# EAGLE board TVMC (EAGLE 4.13)
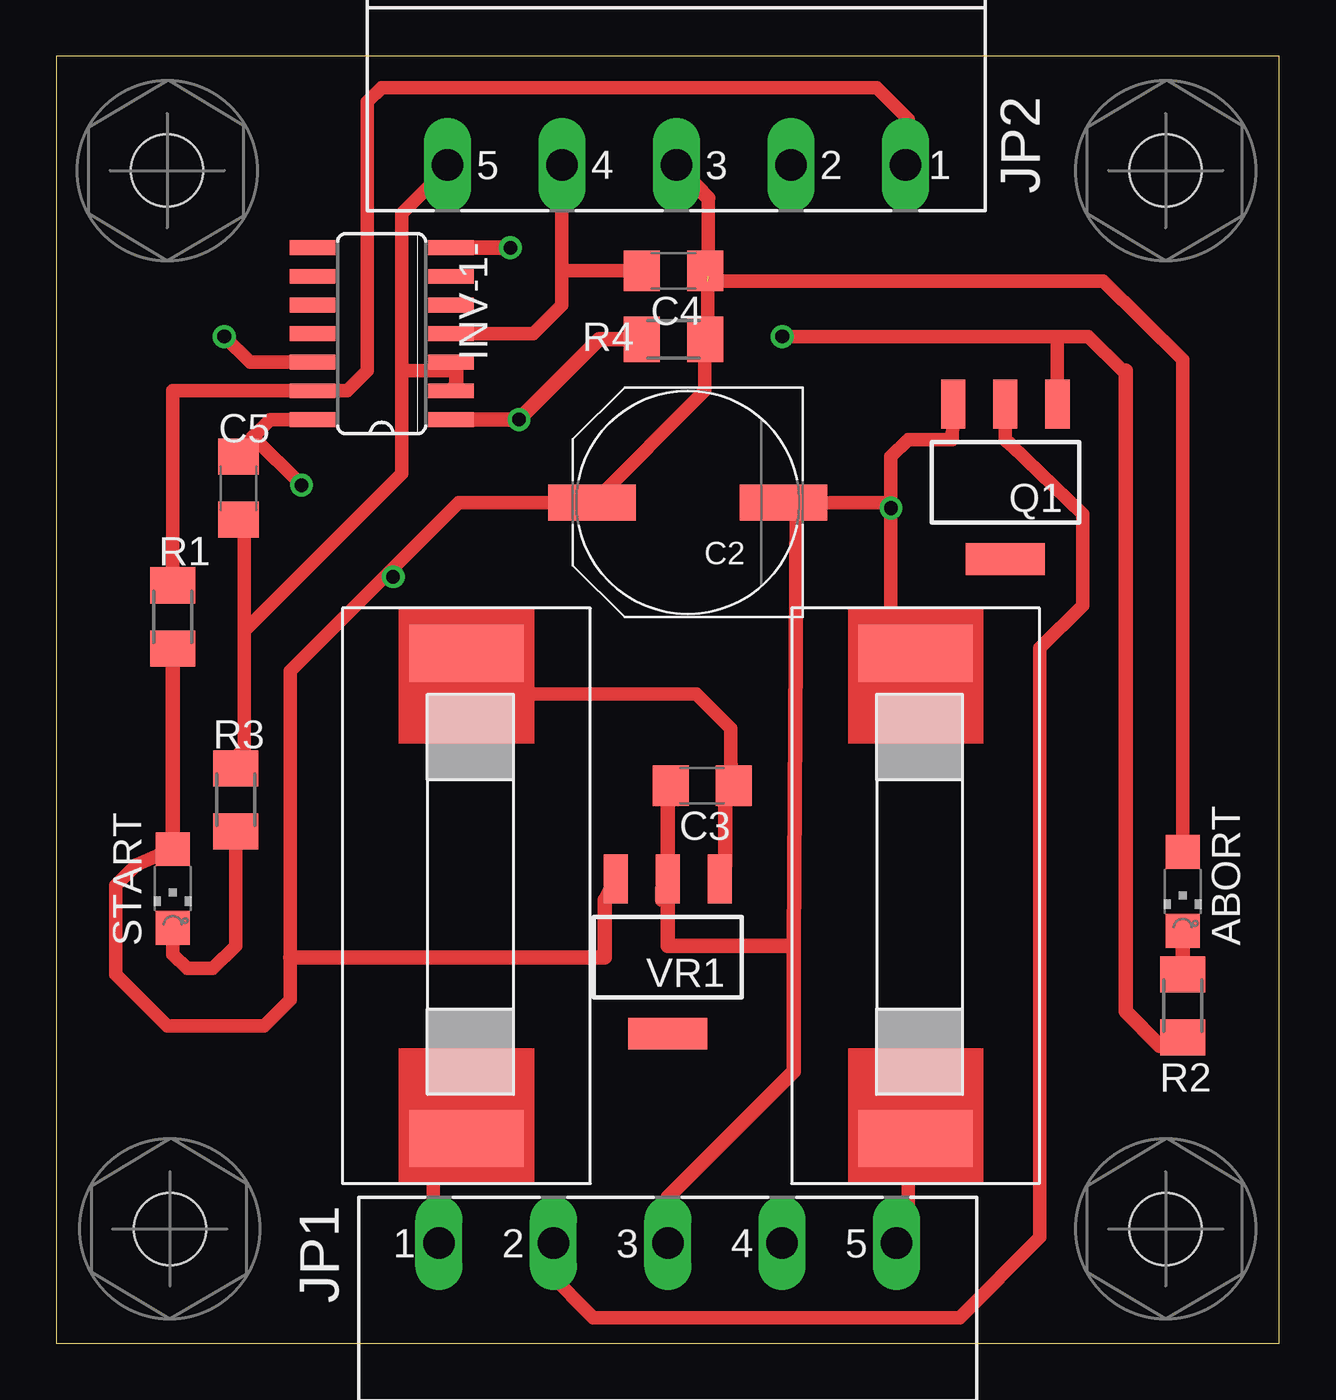
[diagram p0: board, top side]
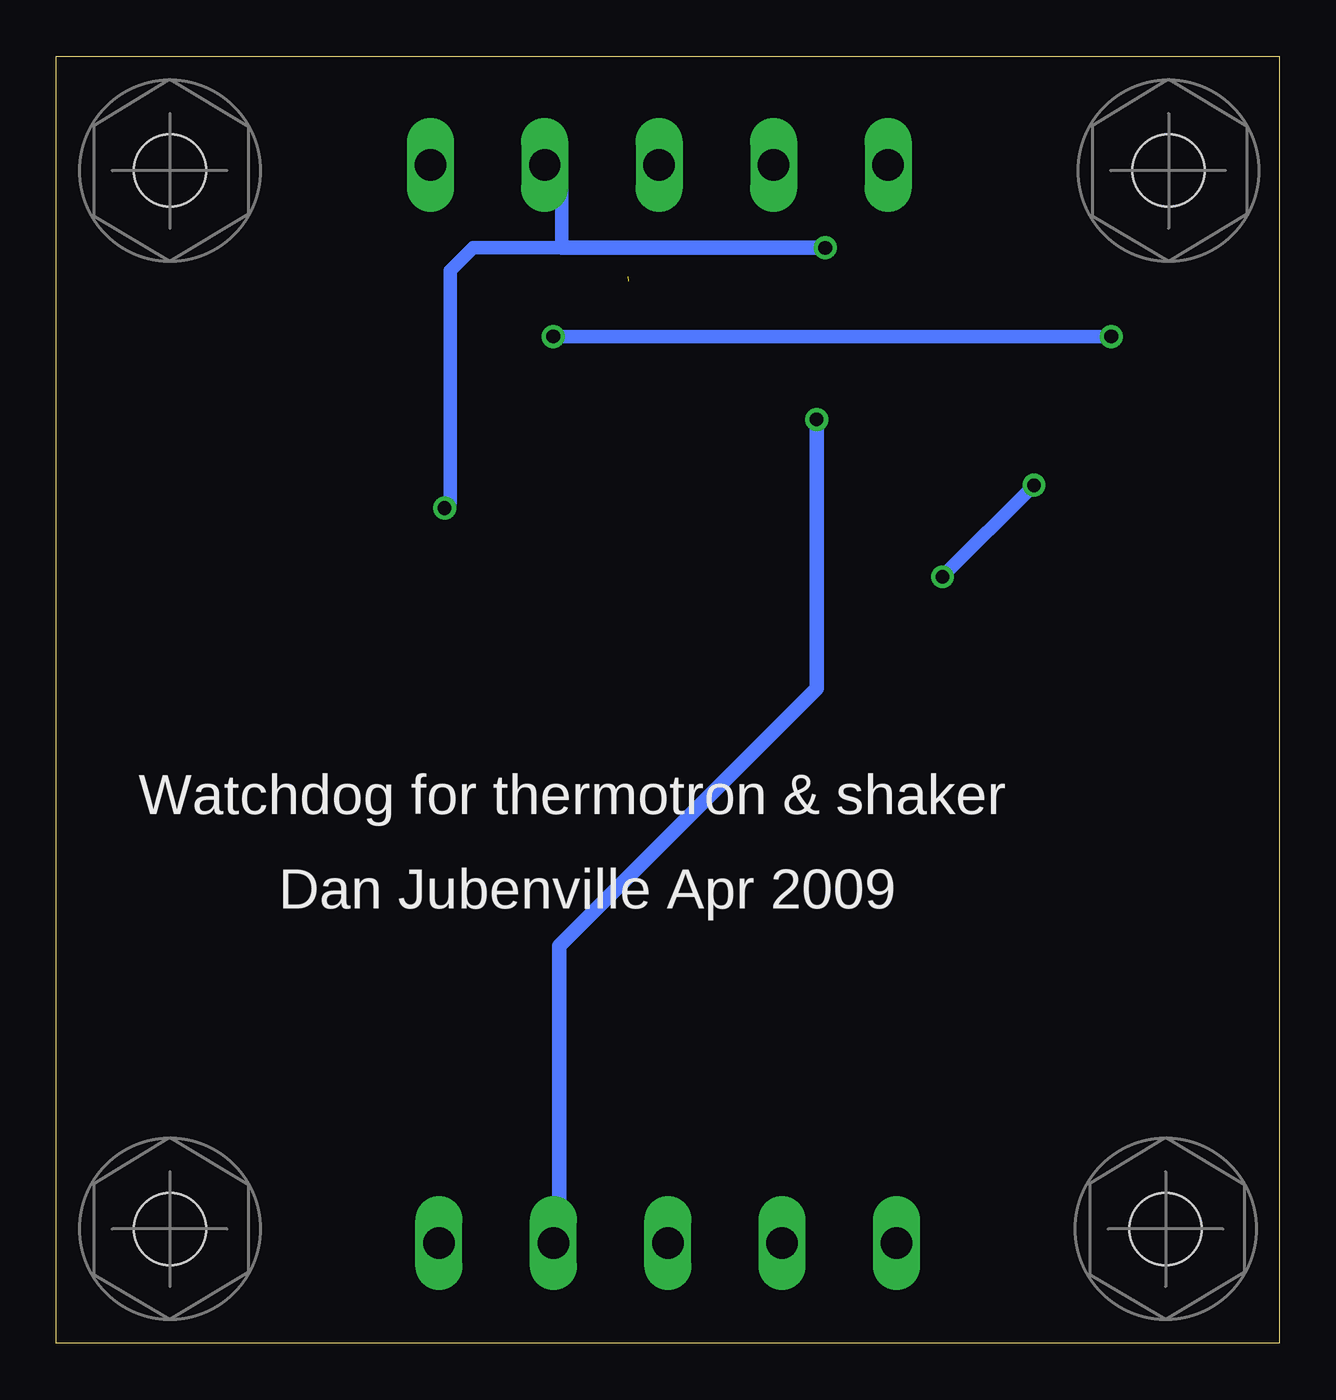
[diagram p1: board, bottom side, seen from below]

Size 54.28 x 57.14 mm. Coordinates in mm from the lower left corner, seen from the top.
Outline: 0,0 54.28,0 54.28,57.14 0,57.14 0,0
Copper layers (1*16): Top 0.035mm / dielectric 1.5mm / Bottom 0.035mm
Design rules "default": minimum track width 20mil, minimum drill 20mil, track to track 10mil, track to pad 10mil, pad to pad 10mil, via to via 10mil, smd to smd 0mil, copper to edge 20mil, drill to drill 8mil, minimum pad ring 10mil, minimum via ring 8mil, stop-mask expansion 4mil, vias tented up to drill 0mil, thermal gap 10mil
vRestrict: area 5,17.8 to 15.2,22.9

## Footprints (pad centres in the part's own frame; a part is rotated, then mirrored left to right if it is on the bottom)
CHIPLED_1206 = smd 1.5 x 1.5: A 0,-1.75; C 0,1.75
PANASONIC_G = smd 3.9 x 1.6: + 4.25,0; - -4.25,0
C1206 = smd 1.6 x 1.8: 1 -1.4,0; 2 1.4,0
SO14 = smd 0.66 x 2.032: 1 -3.81,-3.073; 2 -2.54,-3.073; 3 -1.27,-3.073; 4 0,-3.073; 5 1.27,-3.073; 6 2.54,-3.073; 7 3.81,-3.073; 8 3.81,3.073; 9 2.54,3.073; 10 1.27,3.073; 11 0,3.073; 12 -1.27,3.073; 13 -2.54,3.073; 14 -3.81,3.073
MSTBA5 = drill 1.397 long: 1 -10.16,5.08; 2 -5.08,5.08; 3 0,5.08; 4 5.08,5.08; 5 10.16,5.08
SOT223R_INFINEON = smd 1.067 x 2.184: 1 -2.311,-3.479; 2 0,-3.48; 3 2.312,-3.48 | smd 3.5 x 1.4: 4 0,3.404
M1206 = smd 1.6 x 2: 1 -1.4,0; 2 1.4,0
FUSE = smd 2.54 x 5.08: P$1 2,5.54; P$2 23.54,5.54
SCREW = hole 3.2: 0,0

## Placement (x,y rotation side)
ABORT  [CHIPLED_1206]  50,20.06 180 top
C2  15uF  [PANASONIC_G]  28.03,37.33 180 top
C3  .1uF  [C1206]  28.66,24.76 180 top
C4  >1uF  [C1206]  27.39,47.62 180 top
C5  >1uF  [C1206]  8.09,37.97 270 top
INV-1-  7416D  [SO14]  14.44,44.83 90 top
JP1  MSTBA5  [MSTBA5]  27.14,-0.64 0 top
JP2  MSTBA5  [MSTBA5]  27.52,57.4 180 top
Q1  [SOT223R_INFINEON]  42.13,38.22 180 top
R1  >20k  [M1206]  5.17,32.25 270 top
R2  330  [M1206]  50,14.98 90 top
R3  330  [M1206]  7.96,24.12 270 top
R4  >20k  [M1206]  27.39,44.57 0 top
START  [CHIPLED_1206]  5.17,20.19 180 top
U$1  1/2 amp  [FUSE]  12.66,32.63 270 top
U$2  [SCREW]  49.24,5.08 0 top
U$3  FUSE(SM)  [FUSE]  32.6,32.63 270 top
U$7  [SCREW]  5.04,5.08 0 top
U$8  [SCREW]  4.92,52.06 0 top
U$9  [SCREW]  49.24,52.06 0 top
VR1  [SOT223R_INFINEON]  27.14,17.14 180 top

## Library data of the parts
ABORT START = led
C2-C5 Q1 R1-R4 U$1-U$3 U$7-U$9 VR1 = 1 Dan's Common Parts
INV-1- = 74xx-eu
JP1 JP2 = con-phoenix-508

## Nets
+5V: ABORT.A C2.+ C4.1 C5.1 INV-1-.14 JP2.3 R1.2 R4.2 START.A VR1.3
GND: C2.- C3.2 INV-1-.7 JP1.3 JP2.2 Q1.3 U$3.P$1 VR1.2
N$1: INV-1-.13 JP2.1 R1.1
N$3: JP1.2 Q1.2
N$4: ABORT.C R2.2
N$9: C3.1 U$1.P$1 VR1.1
N$10: INV-1-.1 JP1.4 R4.1
N$12: R3.2 START.C
N$13: INV-1-.12 Q1.1 R2.1
N$14: JP1.5 U$3.P$2
N$15: JP1.1 U$1.P$2
N$16: C4.2 INV-1-.4 JP2.4
N$18: C5.2 INV-1-.2 INV-1-.3 JP2.5 R3.1

## Tracks (layer width: path | path; a pad name or v marks a point on that pad's centre or on a via)
+5V  (via drill 0.61)  (1 unrouted)
  Top 0.61: 15.07,34.54 17.87,37.33 C2.+ 23.84,37.33 28.79,42.29 28.79,44.83 R4.2 28.92,44.7 28.92,47.37 | 14.88,34.35 10.38,29.84 10.38,17.14 10.38,15.23 9.23,14.09 4.92,14.09 2.63,16.38 2.63,20.32 3.55,21.24 START.A | 14.88,34.35 15.07,34.54 | ABORT.A 50,43.68 46.47,47.16 28.89,47.16 | 28.92,47.37 C4.1 | 28.94,50.85 28.94,47.39 28.92,47.37 | 14.88,34.35 14.82,34.16 | INV-1-.14 9.49,41.02 8.09,39.62 C5.1 | C5.1 | C5.1 8.72,40.26 v10.88,38.09 | C5.1 | v14.95,34.03 14.95,34.41 15.07,34.54
  Top 0.635: START.A R1.2 | 28.94,50.85 JP2.3 | 10.38,17.14 24.35,17.14 24.35,19.68 VR1.3
  Bottom 0.61: v14.95,34.03 v10.88,38.09
GND  (via drill 0.61)
  Top 0.61: 32.86,37.21 34.38,37.33 37.05,37.33 | Q1.3 39.76,40.13 37.81,40.13 37.05,39.36 37.05,37.33 | 37.05,37.33 v37.05,37.08 37.05,30.33 U$3.P$1
  Top 0.635: v20.16,48.64 INV-1-.7 | 27.39,24.51 27.39,24.76 27.65,25.01 | 27.65,25.01 27.14,24.76 27.14,17.65 | 32.73,17.65 32.86,37.21 32.6,37.21 C2.- | 27.65,25.01 C3.2 27.14,24 VR1.2 26.89,20.19 26.89,19.68 27.14,19.93 27.14,17.65 | JP1.3 27.14,6.47 32.73,12.06 32.73,17.65 | 32.73,17.65 27.14,17.65
  Bottom 0.61: v37.05,37.08 36.79,37.33 36.79,47.62 35.78,48.64 31.84,48.64 31.84,51.56 JP2.2
  Bottom 0.635: 31.84,48.64 v20.16,48.64
N$1
  Top 0.61: R1.1 5.17,42.29 INV-1-.13 12.92,42.29 13.8,43.17 13.8,55.11 14.44,55.75 36.41,55.75 37.81,54.35 JP2.1
N$3
  Top 0.61: JP1.2 21.81,3.17 23.84,1.14 40.09,1.14 43.65,4.69 43.65,30.86 45.56,32.76 45.56,36.82 42.38,39.87 42.13,40.13 Q1.2
N$4
  Top 0.635: R2.2 ABORT.C
N$9
  Top 0.61: U$1.P$1 17.23,28.82 28.41,28.82 29.93,27.3 29.93,25.78 C3.1
  Top 0.635: VR1.1 29.43,20.7 29.68,21.2 29.68,24 C3.1
N$10  (via drill 0.61)
  Top 0.635: R4.1 24.09,44.57 v20.54,41.02 INV-1-.1
  Bottom 0.635: v20.54,41.02 20.54,29.08 31.97,17.65 31.97,4.95 JP1.4
N$12
  Top 0.61: START.C 5.17,17.27 5.8,16.63 6.95,16.63 7.96,17.65 R3.2
N$13  (via drill 0.61)
  Top 0.61: 11.65,43.56 INV-1-.12 8.6,43.56 v7.46,44.7 | 47.46,43.17 47.33,43.17 45.81,44.7 44.29,44.7 | v32.22,44.7 44.29,44.7 | Q1.1 44.44,44.67 44.29,44.7
  Top 0.635: 47.46,43.17 47.46,14.73 48.98,13.2 R2.1
  Bottom 0.61: v7.46,44.7 v32.22,44.7
N$14
  Top 0.61: U$3.P$2 38.06,10.54 37.81,10.03 37.81,4.69 37.55,4.44 JP1.5
N$15
  Top 0.61: U$1.P$2 15.96,11.55 16.73,11.04 16.73,4.19 JP1.1
N$16
  Top 0.61: INV-1-.4 21.17,44.83 | 21.17,44.83 22.44,46.1 22.44,47.62 | 22.44,47.62 C4.2 | 21.17,44.83 | 22.44,47.62 JP2.4
N$18
  Top 0.61: R3.1 7.96,26.03 8.34,26.41 8.34,31.49 8.34,31.62 | 8.34,31.62 15.33,38.6 15.33,43.17 | 17.11,43.17 17.61,43.17 17.74,43.3 17.51,43.53 INV-1-.3 17.49,43.56 17.11,43.17 | C5.2 8.09,36.44 8.34,36.19 8.34,31.62 | 15.33,43.17 17.11,43.17 | 15.33,43.17 15.33,50.16 17.74,52.57 17.49,52.57 17.36,52.45 JP2.5
  Top 0.635: INV-1-.2 17.74,42.54 17.74,43.3 INV-1-.3

## Text on the board
bNames: Watchdog for thermotron & shaker | Dan Jubenville Apr 2009